# EAGLE board Template_PiggyBack (EAGLE 9.6.2)
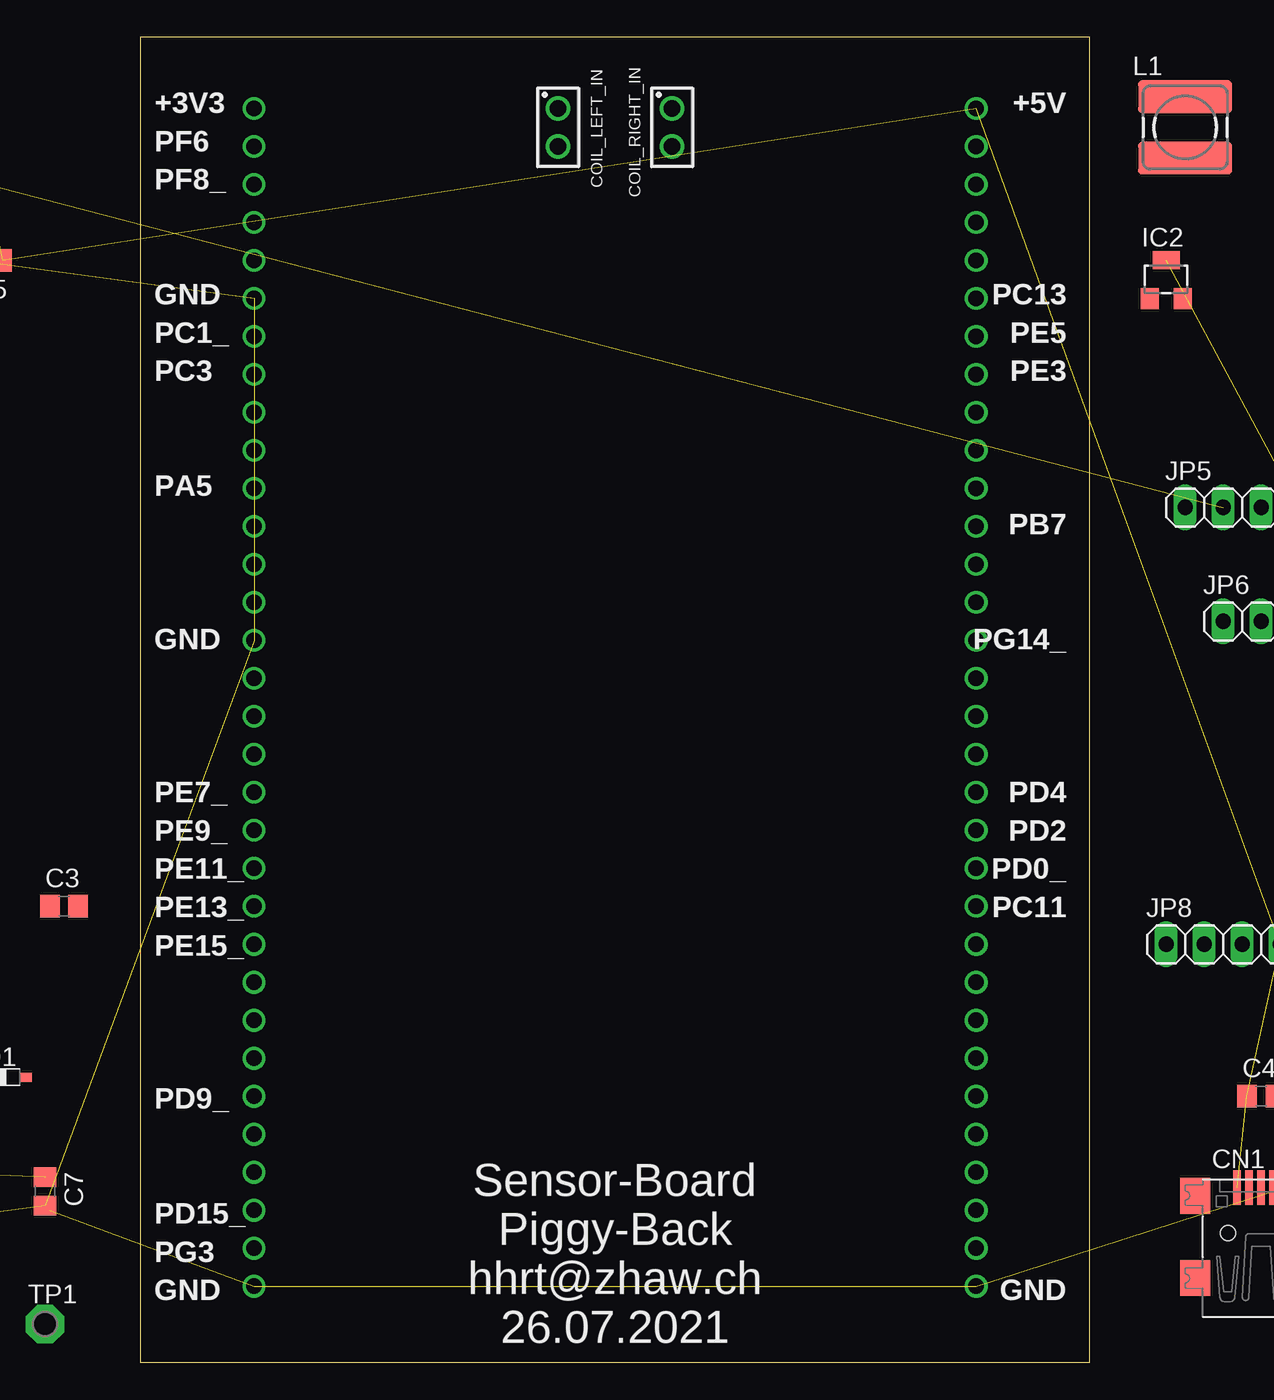
[diagram p0: board, top side]
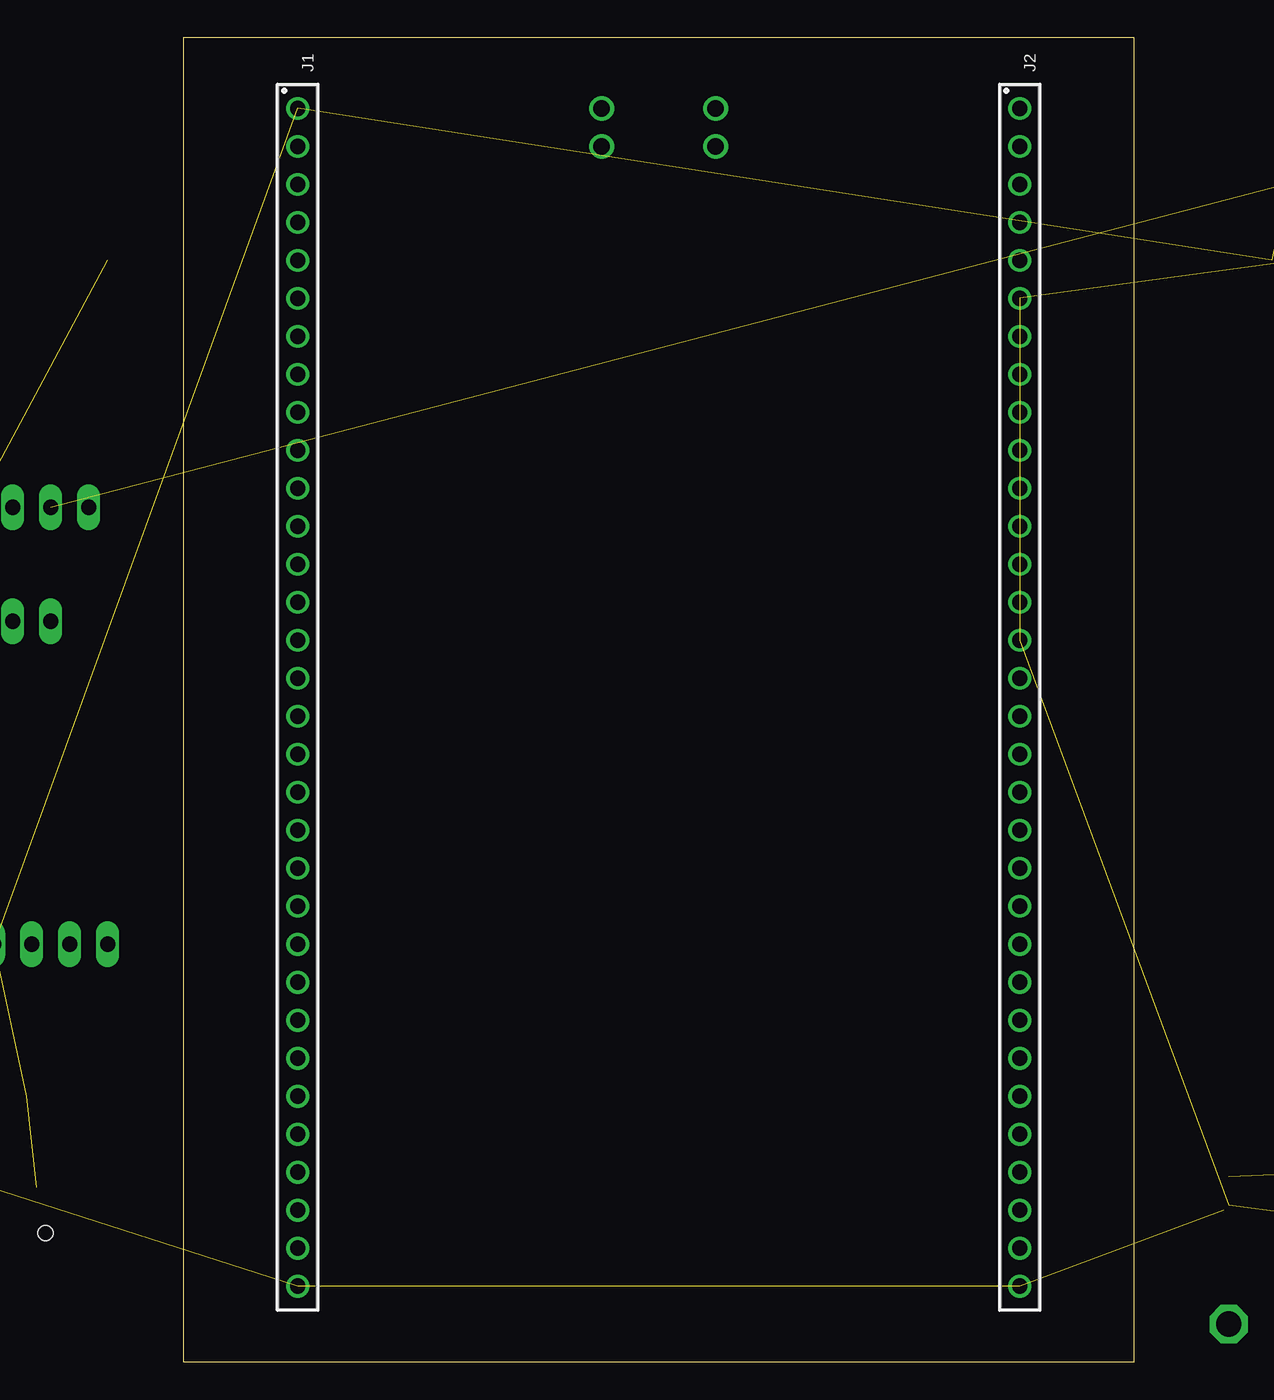
[diagram p1: board, bottom side, seen from below]

Size 63.48 x 88.57 mm. Coordinates in mm from the lower left corner, seen from the top.
Outline: 0,0 63.48,0 63.48,88.57 0,88.57 0,0
Copper layers (1*16): Top 0.018mm / dielectric 1.55mm / Bottom 0.018mm
Design rules "default": minimum track width 0.15mm, minimum drill 0.35mm, track to track 0.15mm, track to pad 0.15mm, pad to pad 0.15mm, via to via 0.15mm, smd to smd 0mil, copper to edge 0.25mm, drill to drill 0.35mm, minimum pad ring 0.175mm, minimum via ring 0.125mm, stop-mask expansion 0mil, vias tented up to drill 0.45mm, thermal gap 0.2mm
bKeepout: area 3.8,3.8 to 5.8,85.1; area 57.7,3.8 to 59.7,85.1

## Footprints (pad centres in the part's own frame; a part is rotated, then mirrored left to right if it is on the bottom)
C1206 = smd 1.6 x 1.8: 1 -1.4,0; 2 1.4,0
C0805 = smd 1.3 x 1.5: 1 -0.95,0; 2 0.95,0
USB-MINIB = smd 0.5 x 2.308: D+ 0,4.064; D- -0.8,4.064; GND 1.6,4.064; ID 0.8,4.064; VBUS -1.6,4.064 | smd 2 x 2.4: GND1 -4.4,-2; GND2 -4.4,3.5; GND3 4.4,3.5; GND4 4.4,-2 | hole 1: -2.2,1; 2.2,1
61300211121 = drill 1.1: 1 -1.27,0; 2 1.27,0
SOD323_ST = smd 0.8 x 0.6: A 1.25,0; C -1.25,0
SMB = smd 2.4 x 2.4: A 2.2,0; C -2.2,0
SO08 = smd 0.6 x 2.2: 1 -1.905,-2.6; 2 -0.635,-2.6; 3 0.635,-2.6; 4 1.905,-2.6; 5 1.905,2.6; 6 0.635,2.6; 7 -0.635,2.6; 8 -1.905,2.6
SOT23-W = smd 1.2 x 1.4: 1 -1.1,-1.3; 2 1.1,-1.3 | smd 1.8 x 1.2: 3 0,1.3
SOT223 = smd 1.499 x 2.007: 1 -2.261,-3.15; 2 0.025,-3.15; 3 2.311,-3.15 | smd 3.81 x 2.007: 4 0,3.15
61303211821 = drill 1.02: 1 -39.37,0; 2 -36.83,0; 3 -34.29,0; 4 -31.75,0; 5 -29.21,0; 6 -26.67,0; 7 -24.13,0; 8 -21.59,0; 9 -19.05,0; 10 -16.51,0; 11 -13.97,0; 12 -11.43,0; 13 -8.89,0; 14 -6.35,0; 15 -3.81,0; 16 -1.27,0; 17 1.27,0; 18 3.81,0; 19 6.35,0; 20 8.89,0; 21 11.43,0; 22 13.97,0; 23 16.51,0; 24 19.05,0; 25 21.59,0; 26 24.13,0; 27 26.67,0; 28 29.21,0; 29 31.75,0; 30 34.29,0; 31 36.83,0; 32 39.37,0
JP1 = drill 0.914 long: 1 0,-1.27; 2 0,1.27
1X05 = drill 1.016 long: 1 -5.08,0; 2 -2.54,0; 3 0,0; 4 2.54,0; 5 5.08,0
1X03 = drill 1.016 long: 1 -2.54,0; 2 0,0; 3 2.54,0
1X06 = drill 1.016 long: 1 -6.35,0; 2 -3.81,0; 3 -1.27,0; 4 1.27,0; 5 3.81,0; 6 6.35,0
POWER-CHOKE_WE-TPC = smd 6.3 x 2.2: 1 0,2.05; 2 0,-2.05
LED_1206 = smd 1.6 x 1.803: A -1.422,0; C 1.422,0
R0805 = smd 1.3 x 1.5: 1 -0.95,0; 2 0.95,0
P1-17 = drill 1.702 pad 2.54 octagon: TP 0,0

## Placement (x,y rotation side)
C1  100u  [C1206]  -17.78,30.48 0 top  (outside the outline)
C2  10u  [C0805]  -11.43,30.48 0 top  (outside the outline)
C3  1u  [C0805]  -5.08,30.48 0 top  (outside the outline)
C4  1u  [C0805]  74.93,17.78 0 top  (outside the outline)
C5  10u  [C0805]  -10.16,73.66 180 top  (outside the outline)
C6  10u  [C0805]  -15.24,73.66 180 top  (outside the outline)
C7  100n  [C0805]  -6.35,11.43 270 top  (outside the outline)
C8  100n  [C0805]  -17.78,25.4 0 top  (outside the outline)
C9  10n  [C0805]  -11.43,25.4 0 top  (outside the outline)
CN1  USB power supply  [USB-MINIB]  74.93,7.62 0 top  (outside the outline)
COIL_LEFT_IN  [61300211121]  27.94,82.55 270 top
COIL_RIGHT_IN  [61300211121]  35.56,82.55 270 top
D1  SD103  [SOD323_ST]  -8.89,19.05 0 top  (outside the outline)
D2  SL13  [SMB]  -16.51,19.05 0 top  (outside the outline)
IC1  MCP6002  [SO08]  -15.88,10.79 270 top  (outside the outline)
IC2  Hall-Sensor-DRV5053VA  [SOT23-W]  68.58,72.39 0 top  (outside the outline)
IC4  REG1117  [SOT223]  -12.7,82.55 0 top  (outside the outline)
J1  [61303211821]  55.88,44.45 270 bottom
J2  [61303211821]  7.62,44.45 270 bottom
JP1  [JP1]  -16.51,2.54 270 top  (outside the outline)
JP5  Radar K-LC5-RFB-00C  [1X05]  74.93,57.15 0 top  (outside the outline)
JP6  Mounting support for K-LC6  [1X03]  74.93,49.53 0 top  (outside the outline)
JP8  OpenLog extension  [1X06]  74.93,27.94 0 top  (outside the outline)
L1  Coil-Sensor-15mH  [POWER-CHOKE_WE-TPC]  69.85,82.55 0 top  (outside the outline)
LED1  [LED_1206]  -16.51,39.37 0 top  (outside the outline)
R1  [R0805]  -16.51,35.56 0 top  (outside the outline)
TP1  PTR1PAD1-17  [P1-17]  -6.35,2.54 0 top  (outside the outline)

## Library data of the parts
C1-C9 = rcl; SPICEPREFIX: C
CN1 = adafruit
COIL_LEFT_IN COIL_RIGHT_IN = Wurth_Connectors_WR-PHD; DATASHEET-URL: https://katalog.we-online.com/em/datasheet/61300211121.pdf; GENDER: Pin Header; IR: 3A; MATES: WR-PHD 2.54mm Angled Socket Header /SMT Socket Header/Socket Header; PACKAGING: Bag; PART-NUMBER: 61300211121; PINS: 2; ROWS: Single; TYPE: Straight
D1 D2 = diode
IC1 = linear
IC2 = allegro; MF: ALLEGRO MICROSYSTEMS, INC.; MPN: A1301ELHLT-T; OC_FARNELL: 1198084; OC_NEWARK: 31K6634
IC4 = burr-brown; MPN: REG1117; OC_FARNELL: 1097566; OC_NEWARK: 14P6981
J1 J2 = Wurth_Connectors_WR-PHD; DATASHEET-URL: https://katalog.we-online.com/em/datasheet/61303211821.pdf; GENDER: Socket Header; IR: 3A; MATES: WR-PHD 2.54mm SMT Pin Header/THT Angled Pin Header/THT Pin Header; PACKAGING: Tray; PART-NUMBER: 61303211821; PINS: 32; ROWS: Single; TYPE: Straight
JP1 = jumper
JP5 JP6 JP8 = pinhead
L1 = rcl; SPICEPREFIX: L
LED1 = eagle-ltspice; SPICEMODEL: NONE; SPICEPREFIX: D; SPICETYPE: diode
R1 = rcl; SPICEPREFIX: R
TP1 = testpad

## Nets
+3.3V_FROM_UC: J2.1
+3V3: C6.1 IC4.2 JP5.2
+5V: C4.1 C5.1 CN1.VBUS IC4.3 J1.1 JP8.4
GND: C4.2 C5.2 C6.2 C7.2 CN1.GND IC1.4 IC2.3 IC4.1 J1.32 J2.6 J2.15 J2.32 JP5.4 JP8.5 JP8.6
IF_I: JP5.3
IF_Q: JP5.1
N$1: C7.1 IC1.8
PA5: J2.11
PA9: JP8.2
PA10: JP8.3
PB7: J1.12
PC1_: J2.7
PC3: J2.8
PC11: J1.22
PC13: J1.6
PD0_: J1.21
PD2: J1.20
PD4: J1.19
PD9_: J2.27
PD15_: J2.30
PE3: J1.8
PE5: J1.7
PE6: JP8.1
PE7_: J2.19
PE9_: J2.20
PE11_: J2.21
PE13_: J2.22
PE15_: J2.23
PF6: J2.2
PF8_: J2.3
PG3: J2.31
PG14_: J1.15
VCC: IC2.1
VCO: JP5.5

## Tracks (layer width: path | path; a pad name or v marks a point on that pad's centre or on a via)
+3V3  (2 unrouted)
+5V  (5 unrouted)
GND  (14 unrouted)
  Top 0.508: -6.03,10.16 C7.2
N$1  (1 unrouted)
  Top 0.508: -6.03,12.7 C7.1

## Text on the board
tNames: +3V3 / PF6 / PF8_ / / / GND / PC1_ / PC3 / / / PA5 / / / / GND / / / / PE7_ / PE9_ / PE11_ / PE13_ / PE15_ / / / / PD9_ / / / PD15_ / PG3 / GND | +5V / / / / / PC13 / PE5 / PE3 / / / / PB7 / / / PG14_ / / / / PD4 / PD2 / PD0_ / PC11 / / / / / / / / / / GND | Sensor-Board / Piggy-Back / hhrt@zhaw.ch / 26.07.2021